# Altium PCB current sensor.PcbDoc
Units mil, origin at the board's own origin, x right, y up, seen from the top; angles counter-clockwise.
Board outline 6000 x 4000 mil, 3 copper layers (Top Layer, Mid-Layer 2, Bottom Layer); 15 components, 14 nets, 38 pads, 6 vias.
Unrouted connection lines stored in the file: 4.
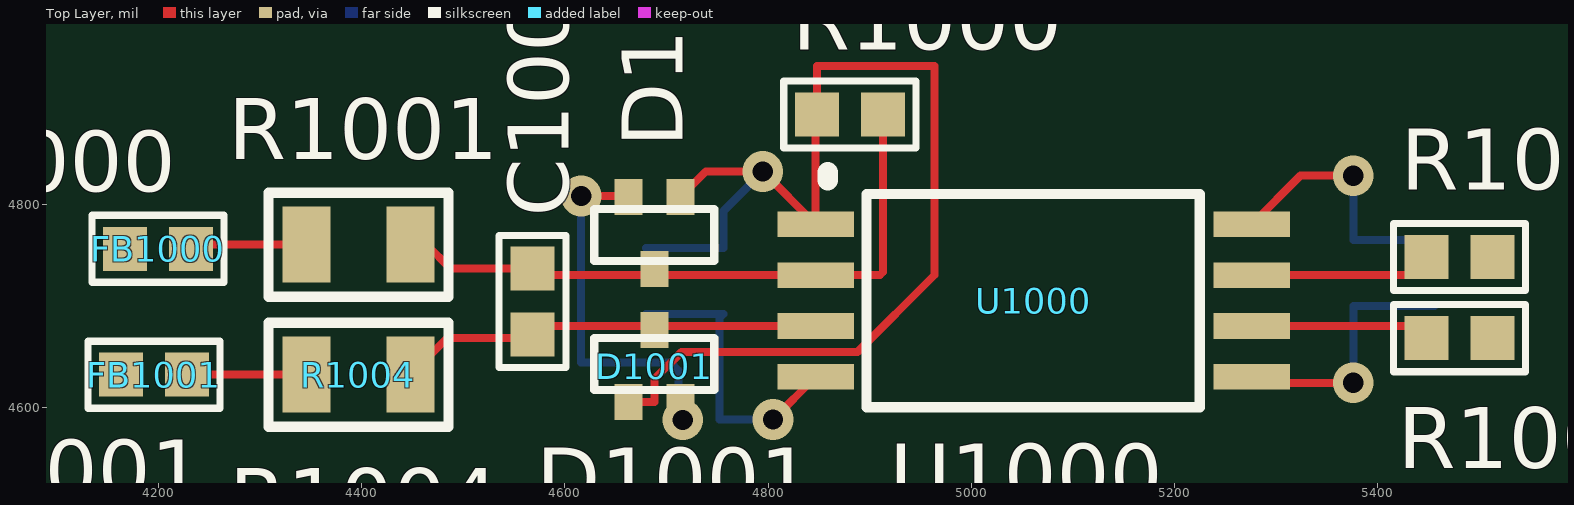
[diagram p0: Top Layer view]
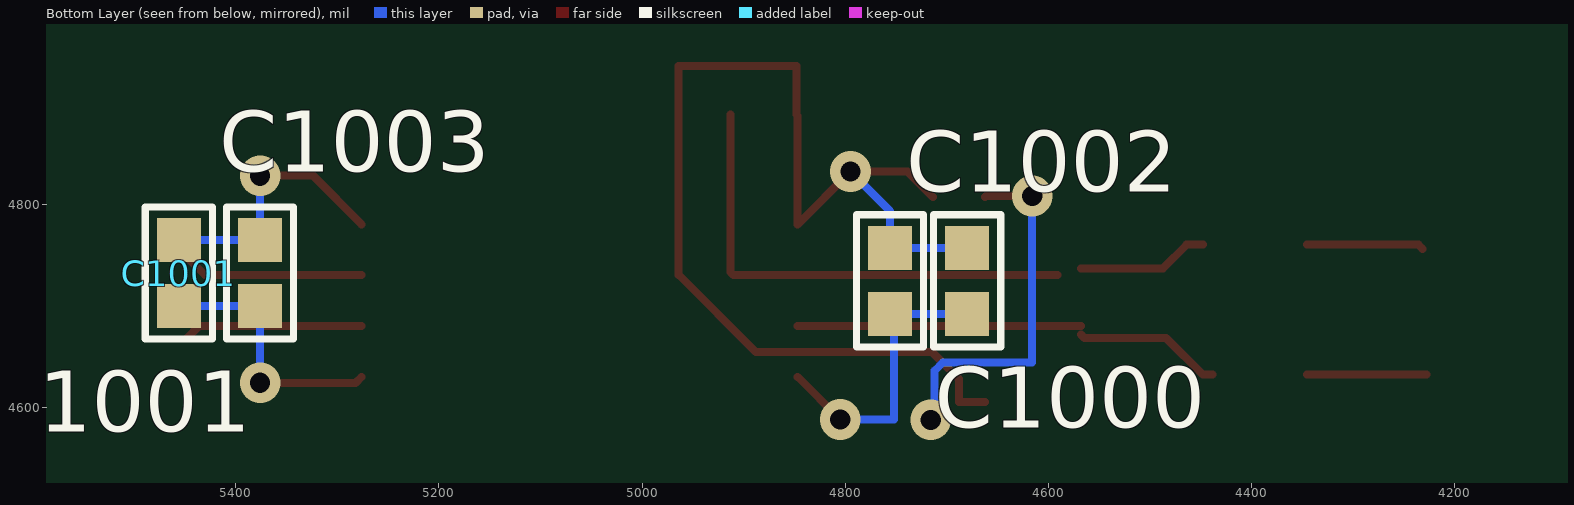
[diagram p1: Bottom Layer view, seen from below]

## Layer stack, top to bottom
Top Solder: solder mask 0.4, Solder Resist, Dk 3.5
Top Layer: signal copper 1.4
Dielectric1: dielectric 12.6, FR-4, Dk 4.8
Mid-Layer 2: signal copper 1.4
Dielectric2: dielectric 12.6, FR-4, Dk 4.8
Bottom Layer: signal copper 1.4
Bottom Solder: solder mask 0.4, Solder Resist, Dk 3.5

## Board outline
1380,2620 1380,6620 7380,6620 7380,2620

## Design rules (kind name [scope] priority, off if disabled: settings)
AssemblyTestPointUsage AssemblyTestPointUsage_1 [All] p2:
AssemblyTestpoint AssemblyTestpoint_1 [All] p2: testpointundercomponent=TRUE minsize=40 maxsize=100 preferedsize=60 minholesize=0 maxholesize=40 preferedholesize=32 testpointgrid=1 usegrid=TRUE gridtolerance=0.01 allowsidetop=TRUE allowsidebottom=TRUE
Clearance [All] p1: gap=7.87 ignorepadtopadclearanceinfootprint=FALSE
ComponentClearance ComponentClearance_1 [All] p2: gap=10 collisioncheckmode=3 verticalgap=10 showdistances=FALSE
DiffPairsRouting DiffPairsRouting_1 [All] p2: maxlimit=10 minlimit=10 mostfreqgap=10 toplayer_minwidth=15 toplayer_maxwidth=15 toplayer_prefwidth=15 midlayer2_minwidth=15 midlayer2_maxwidth=15 midlayer2_prefwidth=15 bottomlayer_minwidth=15 bottomlayer_maxwidth=15 bottomlayer_prefwidth=15 maxuncoupledlength=500
FabricationTestPointUsage TestPointUsage [All] p2: valid=0 allowmultiple=FALSE
FabricationTestpoint Testpoint [All] p2: side=3 testpointundercomponent=TRUE minsize=40 maxsize=100 preferedsize=60 minholesize=0 maxholesize=40 preferedholesize=32 testpointgrid=1 allowsidetop=TRUE allowsidebottom=TRUE usegrid=TRUE gridtolerance=0.01
FanoutControl Fanout_LCC [IsLCC] p1: bgadir=Out bgaviamode=Centered fanoutstyle=Auto fanoutdirection=Alternating viagrid=1 // Fanout_LCC (Default Rule)
FanoutControl Fanout_BGA [IsBGA] p2: bgadir=Out bgaviamode=Centered fanoutstyle=Auto fanoutdirection=Alternating viagrid=1 // Fanout_BGA (Default Rule)
FanoutControl Fanout_Default [All] p4: bgadir=Out bgaviamode=Centered fanoutstyle=Auto fanoutdirection=Alternating viagrid=1 // Fanout_Default (Default Rule)
FanoutControl Fanout_Small [(CompPinCount < 5)] p5: bgadir=Out bgaviamode=Centered fanoutstyle=Auto fanoutdirection=OutThenIn viagrid=1 // Fanout_Small (Default Rule)
FanoutControl Fanout_BGA_1 [IsBGA] p6: bgadir=Out bgaviamode=Centered fanoutstyle=Auto fanoutdirection=Alternating viagrid=1 // Fanout_BGA (Default Rule)
FanoutControl Fanout_LCC_1 [IsLCC] p7: bgadir=Out bgaviamode=Centered fanoutstyle=Auto fanoutdirection=Alternating viagrid=1 // Fanout_LCC (Default Rule)
FanoutControl Fanout_SOIC_1 [IsSOIC] p8: bgadir=Out bgaviamode=Centered fanoutstyle=Auto fanoutdirection=Alternating viagrid=1 // Fanout_SOIC (Default Rule)
FanoutControl Fanout_Small_1 [(CompPinCount < 5)] p9: bgadir=Out bgaviamode=Centered fanoutstyle=Auto fanoutdirection=OutThenIn viagrid=1 // Fanout_Small (Default Rule)
FanoutControl Fanout_Default_1 [All] p10: bgadir=Out bgaviamode=Centered fanoutstyle=Auto fanoutdirection=Alternating viagrid=1 // Fanout_Default (Default Rule)
Height Height_1 [All] p2: minheight=0 maxheight=1000 prefheight=500
HoleSize HoleSize_1 [All] p2: absolutevalues=TRUE maxlimit=100 minlimit=1 maxpercent=80.000 minpercent=20.000
HoleToHoleClearance HoleToHoleClearance_1 [All] p2: gap=10 allowstackedmicrovias=TRUE
LayerPairs LayerPairs_1 [All] p2: enforce=TRUE
MinimumSolderMaskSliver MinimumSolderMaskSliver_1 [All] p2: minsoldermaskwidth=10
NetAntennae NetAntennae_1 [All] p2: netantennaetolerance=0
PasteMaskExpansion PasteMaskExpansion_1 [All] p2: expansion=0
PlaneClearance PlaneClearance_1 [All] p2: clearance=20
PolygonConnect [All] p1: connectstyle=Relief reliefconductorwidth=10 reliefentries=4 polygonreliefangle="90 Angle" airgapwidth=10
PolygonConnect PolygonConnect_1 [All] p2: connectstyle=Relief reliefconductorwidth=10 reliefentries=4 polygonreliefangle="90 Angle" airgapwidth=10
RoutingLayers [All] p1: top layer_v5=TRUE mid layer 2_v5=FALSE bottom layer_v5=TRUE
RoutingPriority RoutingPriority_1 [All] p2: routingpriority=0
RoutingTopology RoutingTopology_1 [All] p2: topology=Shortest
RoutingVias [All] p1: holewidth=23.62 width=39.37 viastyle="Through Hole" minholewidth=19.68 minwidth=39.37 maxholewidth=28 maxwidth=50
ShortCircuit ShortCircuit_1 [All] p2: allowed=FALSE
SilkToBoardRegionClearance SilkToBoardRegionClearance_1 [All] p2:
SilkToSilkClearance SilkToSilkClearance_1 [All] p2: silktosilkclearance=10
SilkToSolderMaskClearance SilkscreenOverComponentPads [IsPad] p2: minsilkscreentomaskgap=10 clearancetoexposedcopper=TRUE
SolderMaskExpansion [All] p1: expansion=4
SolderMaskExpansion SolderMaskExpansion_1 [All] p2: expansion=4
UnRoutedNet UnRoutedNet_1 [All] p2:
UnpouredPolygon UnpouredPolygon_1 [All] p2:
Width [All] p1: maxlimit=7.87 minlimit=7.87 preferedwidth=7.87
25 further rules are at their usual default settings.

## Components (designator, comment, footprint, x,y, rotation, side; value= is the part's Value field where it differs from the comment)
C1000 "Cap 0603_new" "0603 (1608 Metric)" 4680,4724.48 r90 bottom value=1uF
C1001 "Cap 0603_new" "0603 (1608 Metric)" 5456,4732 r270 bottom value=1uF
C1002 "Cap 0603_new" "0603 (1608 Metric)" 4756,4724.48 r90 bottom value=0.1uF
C1003 "Cap 0603_new" "0603 (1608 Metric)" 5376,4732 r270 bottom value=0.1uF
C1004 "Cap 0603_new" "0603 (1608 Metric)" 4568,4704 r270 top value=330pF
D1000 "Diode_ESD" SOT323_ESD 4688,4732.06 r180 top value=ESD
D1001 "Diode_ESD" SOT323_ESD 4688,4679.94 r0 top value=ESD
FB1000 "Ferrite bead" "0603 (1608 Metric)" 4199.52,4756 r0 top value=1K
FB1001 "Ferrite bead" "0603 (1608 Metric)" 4195.52,4632 r0 top value=1K
R1000 "NC" "0603 (1608 Metric)" 4880.48,4888 r180 top value=160k
R1001 "Resistor 1206" 1206 4396.82,4760 r0 top value=12R
R1002 "Resistor 0603" "0603 (1608 Metric)" 5480.48,4748 r0 top value=10R
R1003 "Resistor 0603" "0603 (1608 Metric)" 5480.48,4668 r0 top value=10R
R1004 "Resistor 1206" 1206 4396.82,4632 r0 top value=12R
U1000 "AMC1100" SOP8 4846.87,4780 r270 top

## Footprints (in the part's own frame and the unit in brackets; to place one, negate y for a bottom-side part, rotate by r counter-clockwise, add the part's x,y. Pads: shape width x height; smd on the part's side, far side on the other; paste and mask are expansions set on the pad)
"0603 (1608 Metric)" [mm]
  rect 1.1x1.1 smd: 1(-0.825,0) 2(0.825,0)
  silkscreen extent -1.65,-0.84 1.65,0.84, body extent -1.02,-0.51 1.02,0.51, height 0.5
1206 [mm] "1206\" surface mount"
  rect 1.2x1.9 smd: 1(-1.3,0) 2(1.3,0)
  silkscreen extent -2.25,-1.3 2.25,1.3, body extent -1.6,-0.72 1.6,0.73, height 1
SOP8 [mm]
  rect 0.64x1.905 smd: 1(0,0) 2(1.27,0) 3(2.54,0) 4(3.81,0) 5(3.81,10.9) 6(2.54,10.9) 7(1.27,10.9) 8(0,10.9)
  silkscreen extent -1.3,0.3 4.57,9.6
SOT323_ESD [mm]
  rect 0.7x0.9 smd: 1(-0.65,-1.9) 2(0.65,-1.9) C(0,-0.1)
  silkscreen extent -1.5,-1.6 1.5,-0.3

## Part data
C1000 C1001: "CAP CER 1UF 50V X5R 0603", part=1276-1860-1-ND
C1002 C1003: "CAP CER 0.1UF 50V Y5V 0603", part=311-1343-6-ND
C1004: "CAP CER 330PF 50V C0G 0603", part=445-7033-2-ND
FB1000 FB1001: "FERRITE BEAD 1 KOHM 0603 1LN", part=445-8672-1-ND
R1000: library part "Resistor 0603", "Resistor 0603"
R1001 R1004: "12 Ohm ?.5% 0.25W, 1/4W Chip Resistor 1206", part=311-2961-1-ND
R1002 R1003: "RES SMD 10 OHM 0.05% 1/10W 0603", part=RNCF0603AKT10R0CT-ND
D1000: part=DESD1P0RFW-7
D1001: part=DESD1P0RFW

## Via types
v1: diameter 40, hole 20, Top Layer to Bottom Layer, 6 vias

## Nets (pads, with @x,y where several pads share a name; then routed paths per layer and width w, separated by ;. In a path a pad name is that pad's centre, name@x,y a point inside that pad or via, vN(x,y) a via of type N, cw(c..) or ccw(c..) an arc to the next point about the centre after c; other vN are vias at no path point)
5V_LV: 
+5V_USH1: 
-5V_USH1: 
GND_LV: 
GND_USH1: 
NetC1004_1: 
NetC1004_2: 
NetFB1000_1: 
NetFB1000_2: 
NetFB1001_2: 
NetR1002_1: 
NetR1002_2: 
NetR1003_1: 
NetR1003_2: 
pads on no net: C1000.1 C1000.2 C1001.1 C1001.2 C1002.1 C1002.2 C1003.1 C1003.2 C1004.1 C1004.2 D1000.1 D1000.2 D1000.C D1001.1 D1001.2 D1001.C FB1000.1 FB1000.2 FB1001.1 FB1001.2 R1000.1 R1000.2 R1001.1 R1001.2 R1002.1 R1002.2 R1003.1 R1003.2 R1004.1 R1004.2 U1000.1 U1000.2 U1000.3 U1000.4 U1000.5 U1000.6 U1000.7 U1000.8
copper on no net: | length 3980.7
  Top Layer w7.87: 4228,4632 4345.64,4632 ; 4232,4756 4236,4760 4345.64,4760 ; 4438.36,4632 4448,4632 4484.25,4668.25 4564.73,4668.25 4568,4671.52 ; 4448,4760 4464,4760 4487.52,4736.48 4568,4736.48 ; 4568,4680 4846.87,4680 ; 4590.98,4730 4846.87,4730 4910,4730 4912.96,4732.96 4912.96,4888 ; v1(4616,4808) 4661.28,4808 4662.41,4806.87 ; 4662.41,4605.13 4688,4605.13 4688,4627.74 4714.67,4654.41 4888.08,4654.41 4964,4730.33 4964,4936 4848,4936 4848,4888 4846.87,4886.87 4846.87,4780 v1(4794.87,4832) 4738.72,4832 4713.59,4806.87 ; v1@4712,4591.54 v1(4716,4587.54) ; v1(4804.87,4588) 4846.87,4630 ; 5276,4630 5282,4624 v1(5376,4624) ; 5276,4680 5436,4680 5448,4668 ; 5276,4730 5430,4730 5448,4748 ; 5276,4780 5324,4828 v1(5376,4828)
  Bottom Layer w7.87: v1(4616,4808) 4616,4644 4704,4644 4712,4636 4712,4591.54 v1(4716,4587.54) ; 4680,4692 4756,4692 4752,4688 4752,4588 v1(4804.87,4588) ; 4680,4756.96 4756,4756.96 4756,4793.13 v1(4794.87,4832) ; v1(5376,4624) 5376,4699.52 5456,4699.52 ; v1(5376,4828) 5376,4764.48 5456,4764.48

## Silkscreen, mask and mechanical layers (free items; w line width, h text height)
Mechanical 16:
  lines w5: -1000,256.46 -1000,7756.46 ; -1000,2132.46 -800,2132.46 ; -1000,4004.46 -800,4004.46 ; -1000,5884.46 -800,5884.46 ; -800,456.46 -800,7556.46 ; 328,1948 528,1948 ; 328,3820 528,3820 ; 328,5700 528,5700 ; 1376,7556.46 1376,7756.46 ; 2704,7372 2704,7572 ; 3748,7556.46 3748,7756.46 ; 5076,7372 5076,7572 ; 6125,7556.46 6125,7756.46 ; 7453,7372 7453,7572
  text "1" at 172.34,7621.46 h70
  text "2" at 2530.35,7621.46 h70
  text "3" at 4907,7621.46 h70
  text "4" at 7282.35,7621.46 h70
  text "1" at 1500.34,7437 h70
  text "2" at 3858.35,7437 h70
  text "3" at 6235,7437 h70
  text "A" at -925,6731.46 h70
  text "A" at 403,6547 h70
  text "B" at -925,4855.46 h70
  text "B" at 403,4671 h70
  text "C" at -925,2979.46 h70
  text "C" at 403,2795 h70